# EAGLE board SchematicHandroute (EAGLE 9.5.2)
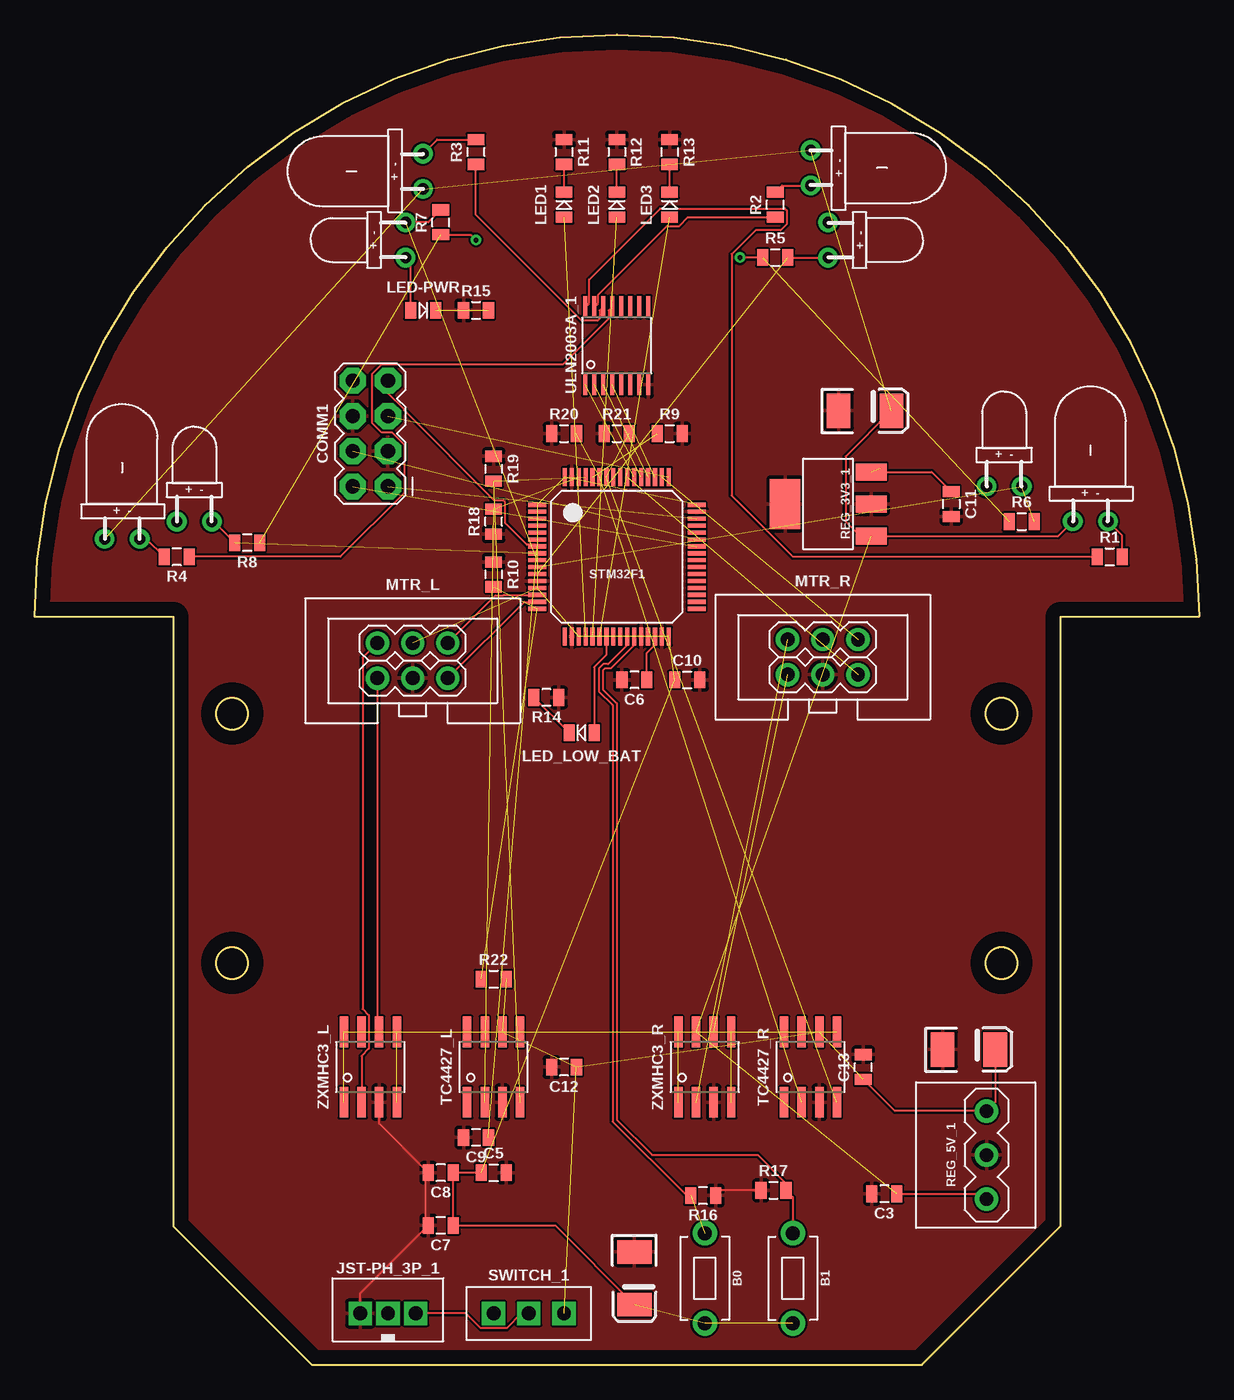
[diagram p0: board, top side]
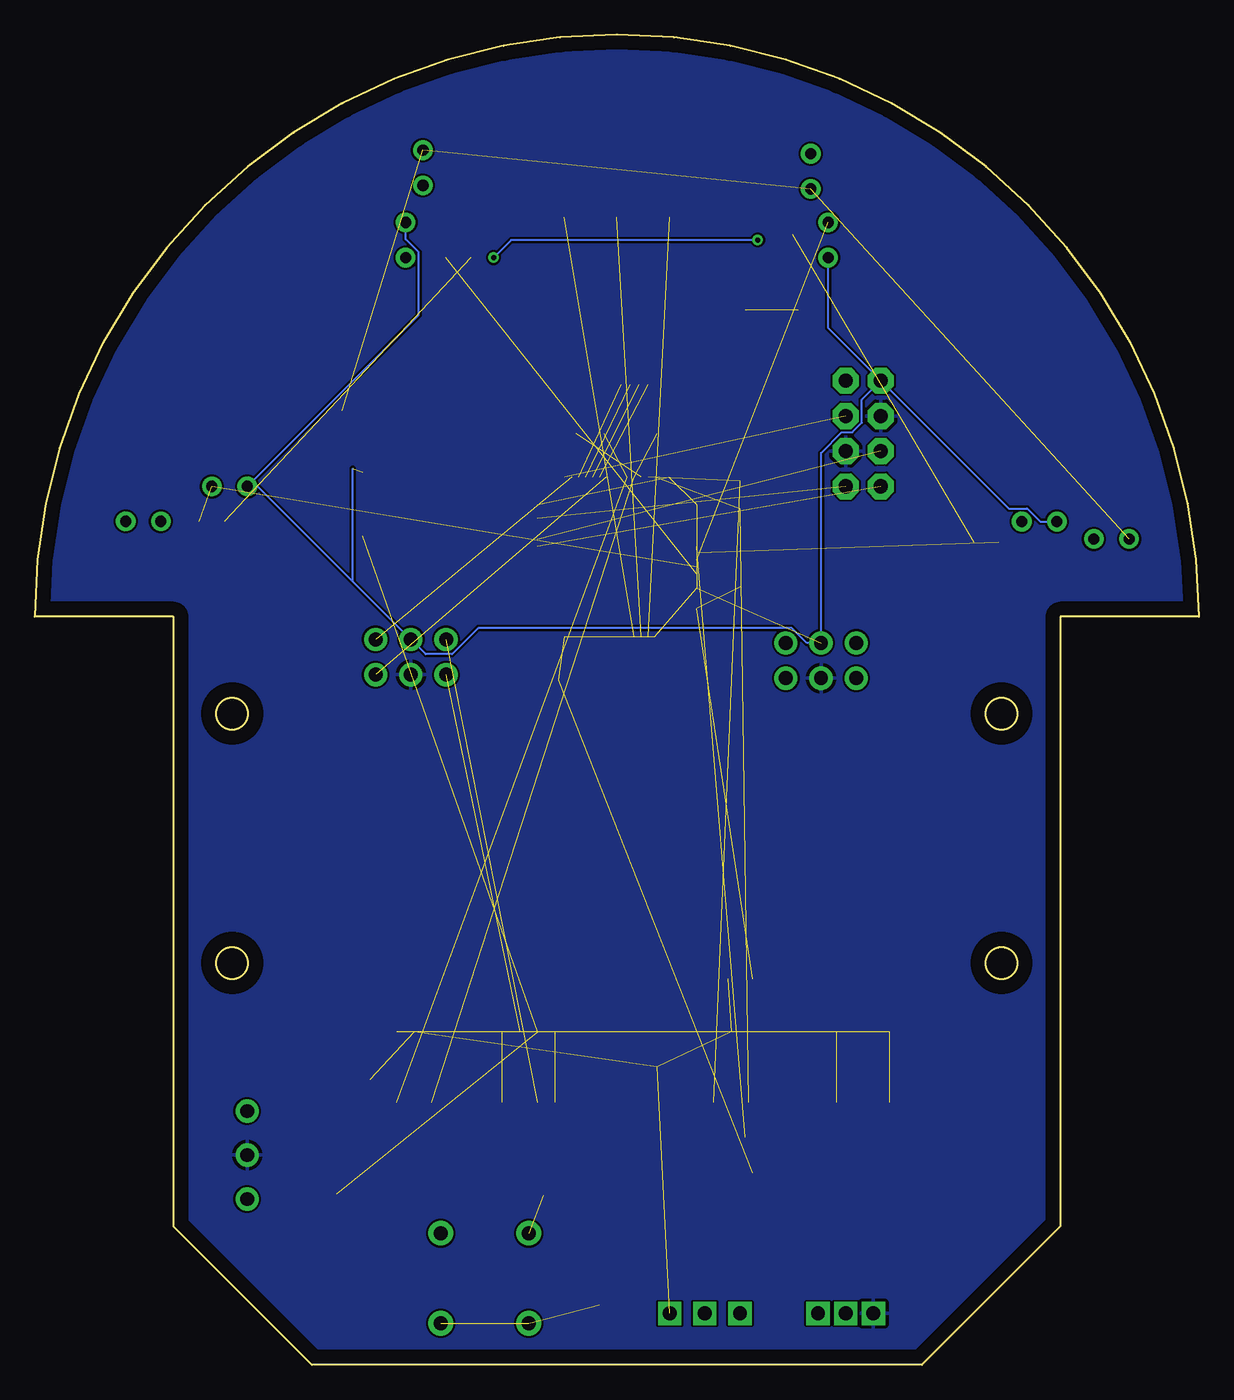
[diagram p1: board, bottom side, seen from below]

Size 84 x 96 mm. Coordinates in mm from the lower left corner, seen from the top.
Copper layers (1*16): Top 0.035mm / dielectric 1.5mm / Bottom 0.035mm
Design rules "default": minimum track width 6mil, minimum drill 0.35mm, track to track 6mil, track to pad 6mil, pad to pad 6mil, via to via 6mil, smd to smd 6mil, copper to edge 40mil, drill to drill 6mil, minimum pad ring 10mil, minimum via ring 8mil, stop-mask expansion 4mil, vias tented up to drill 0mil, thermal gap 10mil

## Footprints (pad centres in the part's own frame; a part is rotated, then mirrored left to right if it is on the bottom)
POLOLU_BUTTON = drill 1 pad 1.778: P$1 -3.25,0; P$2 3.25,0
CAP_TANT_1210IN_3528MM = smd 1.7 x 2.5: A 1.9,0; C -1.9,0
0805 = smd 0.8 x 1.2: 1 -0.9,0; 2 0.9,0
2X4 = drill 1.016 pad 1.88 octagon: 1 -3.81,-1.27; 2 -3.81,1.27; 3 -1.27,-1.27; 4 -1.27,1.27; 5 1.27,-1.27; 6 1.27,1.27; 7 3.81,-1.27; 8 3.81,1.27
EMITTER = drill 0.8 pad 1.422: EM_+ -1.397,0.016; EM_- 1.143,0.016
B3B-PH-K-S = drill 1 pad 1.676 square: BAT_+ 2,0; BAT_- -2,0; NC 0,0
LED-0805 = smd 0.8 x 1.2: A -0.9,0; C 0.9,0
MOTOR_ENCODER_HEADER = drill 1 pad 1.676: ENC_A 2.54,1.27; ENC_B 2.54,-1.27; ENC_GND 0,-1.27; ENC_VDD 0,1.27; MTR+ -2.54,1.27; MTR_- -2.54,-1.27
RECEIVER = drill 0.8 pad 1.422: RE_+ -1.27,0; RE_- 1.27,0
SOT223 = smd 1.219 x 2.235: GND 0,-3.099; IN -2.311,-3.099; OUT 2.311,-3.099 | smd 3.6 x 2.2: GND2 0,3.099
5V_REG_MURATA = drill 1 pad 1.676: GND 0,0; IN -3.175,0; OUT 3.175,0
LQFP64 = smd 0.3 x 1.3: BOOT0 -1.75,5.75; PA3 -3.75,-5.75; PA4 -2.25,-5.75; PA5 -1.75,-5.75; PA6 -1.25,-5.75; PA7 -0.75,-5.75; PA14 3.75,5.75; PA15 3.25,5.75; PB0 0.75,-5.75; PB1 1.25,-5.75; PB2 1.75,-5.75; PB3 0.75,5.75; PB4 0.25,5.75; PB5 -0.25,5.75; PB6 -0.75,5.75; PB7 -1.25,5.75; PB8 -2.25,5.75; PB9 -2.75,5.75; PB10 2.25,-5.75; PC4 -0.25,-5.75; PC5 0.25,-5.75; PC10 2.75,5.75; PC11 2.25,5.75; PC12 1.75,5.75; PD2 1.25,5.75; VCAP_1 2.75,-5.75; VDD_0 -2.75,-5.75; VDD_1 3.75,-5.75; VDD_3 -3.75,5.75; VSS_0 -3.25,-5.75; VSS_1 -3.25,5.75; VSS_2 3.25,-5.75 | smd 1.3 x 0.3: NRST -5.75,0.75; PA0_WKUP -5.75,-2.75; PA1 -5.75,-3.25; PA2 -5.75,-3.75; PA8 5.75,0.25; PA9 5.75,0.75; PA10 5.75,1.25; PA11 5.75,1.75; PA12 5.75,2.25; PA13 5.75,2.75; PB12 5.75,-3.75; PB13 5.75,-3.25; PB14 5.75,-2.75; PB15 5.75,-2.25; PC0 -5.75,0.25; PC1 -5.75,-0.25; PC2 -5.75,-0.75; PC3 -5.75,-1.25; PC6 5.75,-1.75; PC7 5.75,-1.25; PC8 5.75,-0.75; PC9 5.75,-0.25; PC13 -5.75,3.25; PC14 -5.75,2.75; PC15 -5.75,2.25; PH0 -5.75,1.75; PH1 -5.75,1.25; VBAT -5.75,3.75; VDD_2 5.75,3.75; VDDA -5.75,-2.25; VSS_3 5.75,3.25; VSSA -5.75,-1.75
POLOLU_SWITCH = drill 1 pad 1.676 square: PIN1 -2.54,0; PIN2 0,0; PIN3 2.54,0
TC4427_SOIC8 = smd 0.61 x 2.21: GND 0.635,-2.54; IN_A -0.635,-2.54; IN_B 1.905,-2.54; NC1 -1.905,-2.54; NC2 -1.905,2.54; OUT_A -0.635,2.54; OUT_B 1.905,2.54; VDD 0.635,2.54
ULN2003A = smd 1.55 x 0.3: 1B -2.8,2.275; 1C 2.8,2.275; 2B -2.8,1.625; 2C 2.8,1.625; 3B -2.8,0.975; 3C 2.8,0.975; 4B -2.8,0.325; 4C 2.8,0.325; 5B -2.8,-0.325; 5C 2.8,-0.325; 6B -2.8,-0.975; 6C 2.8,-0.975; 7B -2.8,-1.625; 7C 2.8,-1.625; COM 2.8,-2.275; GND -2.8,-2.275
ZXMHC3 = smd 0.61 x 2.21: N1D/P1D -0.635,-2.54; N1G -1.905,-2.54; N1S/N2S 0.635,-2.54; N2D/P2D 0.635,2.54; N2G 1.905,-2.54; P1G -1.905,2.54; P1S/P2S -0.635,2.54; P2G 1.905,2.54

## Placement (x,y rotation side)
B0  POLOLU_BUTTON  [POLOLU_BUTTON]  48.35,6.25 270 top
B1  POLOLU_BUTTON  [POLOLU_BUTTON]  54.7,6.25 270 top
C1  47uF  [CAP_TANT_1210IN_3528MM]  67.4,22.76 0 top
C2  47  [CAP_TANT_1210IN_3528MM]  59.91,68.86 0 top
C3  10uF  [0805]  61.3,12.35 180 top
C4  47uF  [CAP_TANT_1210IN_3528MM]  43.27,6.25 270 top
C5  0.1uF  [0805]  33.11,13.87 0 top
C6  2.2uF  [0805]  43.27,49.43 180 top
C7  0.1uF  [0805]  29.3,10.06 180 top
C8  0.1uF  [0805]  29.3,13.87 180 top
C9  0.1uF  [0805]  31.84,16.41 180 top
C10  0.1uF  [0805]  47.08,49.43 0 top
C11  0.1uF  [0805]  66.13,62.13 270 top
C12  1.0uF  [0805]  38.19,21.49 180 top
C13  1.0uF  [0805]  59.78,21.49 90 top
COMM1  M04X2  [2X4]  24.22,67.21 90 top
EM_1  SFH4545  [EMITTER]  76.29,60.86 0 top
EM_2  SFH4545  [EMITTER]  55.97,86.26 270 top
EM_3  SFH4545  [EMITTER]  28.03,86.26 90 top
EM_4  SFH4545  [EMITTER]  6.44,59.59 0 top
JST-PH_3P_1  3PIN  [B3B-PH-K-S]  25.49,3.71 0 top
LED1  LED  [LED-0805]  38.19,83.72 90 top
LED2  LED  [LED-0805]  42,83.72 90 top
LED3  LED  [LED-0805]  45.81,83.72 90 top
LED-PWR  LED  [LED-0805]  28.03,76.1 0 top
LED_LOW_BAT  LED  [LED-0805]  39.46,45.62 180 top
MTR_L  MOTOR_ENCODER_HEADER  [MOTOR_ENCODER_HEADER]  27.27,50.83 0 top
MTR_R  MOTOR_ENCODER_HEADER  [MOTOR_ENCODER_HEADER]  56.86,51.08 0 top
R1  16K  [0805]  77.56,58.32 0 top
R2  16K  [0805]  53.43,83.72 90 top
R3  16K  [0805]  31.84,87.53 90 top
R4  16K  [0805]  10.25,58.32 180 top
R5  1.8K  [0805]  53.43,79.91 0 top
R6  1.8K  [0805]  71.21,60.86 0 top
R7  1.8K  [0805]  29.3,82.45 90 top
R8  1.8K  [0805]  15.33,59.34 180 top
R9  47K  [0805]  45.81,67.21 0 top
R10  10K  [0805]  33.11,57.05 270 top
R11  1K  [0805]  38.19,87.53 270 top
R12  1K  [0805]  42,87.53 270 top
R13  1K  [0805]  45.81,87.53 270 top
R14  1K  [0805]  36.92,48.16 180 top
R15  1K  [0805]  31.84,76.1 0 top
R16  47K  [0805]  48.22,12.22 180 top
R17  47K  [0805]  53.3,12.6 0 top
R18  47K  [0805]  33.11,60.86 90 top
R19  47K  [0805]  33.11,64.67 270 top
R20  47K  [0805]  38.19,67.21 0 top
R21  47K  [0805]  42,67.21 0 top
R22  30K  [0805]  33.11,27.84 0 top
RE_LD  TEFT4300  [RECEIVER]  69.94,63.4 0 top
RE_LF  TEFT4300  [RECEIVER]  57.24,81.18 270 top
RE_RD  TEFT4300  [RECEIVER]  26.76,81.18 90 top
RE_RF  TEFT4300  [RECEIVER]  11.52,60.86 0 top
REG_3V3_1  3V3_REG  [SOT223]  57.24,62.13 90 top
REG_5V_1  REG_5V_MURATA  [5V_REG_MURATA]  68.67,15.14 270 top
STM32F1  STM32F4_401_410_411_412_413_446  [LQFP64]  42,58.32 0 top
SWITCH_1  POLOLU_SWITCH  [POLOLU_SWITCH]  35.65,3.71 0 top
TC4427_L  TC4427_SOIC8  [TC4427_SOIC8]  33.11,21.49 0 top
TC4427_R  TC4427_SOIC8  [TC4427_SOIC8]  55.97,21.49 0 top
U$1  [MOUSE_OUTLINE_2WHEEL]  42,38 0 top
ULN2003A_1  ULN2003A  [ULN2003A]  42,73.56 90 top
ZXMHC3_L  ZXMHC3  [ZXMHC3]  24.22,21.49 0 top
ZXMHC3_R  ZXMHC3  [ZXMHC3]  48.35,21.49 0 top

## Library data of the parts
B0 B1 = POLOLU_BUTTON
C1 C2 C4 = CAP_TANT_1210IN_3528MM
C3 C5-C13 = CAP_CERAMIC_0805IN_2012MM
COMM1 = 2X4_PIN_HEADER
EM_1-EM_4 = SFH4545
JST-PH_3P_1 = BATT_JST-PH_3PIN
LED1-LED3 LED-PWR LED_LOW_BAT = LED_0805
MTR_L MTR_R = MOTOR_ENCODER_HEADER
R1-R22 = RESISTOR_0805IN_2012MM
RE_LD RE_LF RE_RD RE_RF = TEFT4300
REG_3V3_1 = REG_3V3_LM3940
REG_5V_1 = REG_5V_MURATA
STM32F1 = STM32F4_401_410_411_412_413_446
SWITCH_1 = POLOLU_SWITCH
TC4427_L TC4427_R = TC4427
U$1 = MOUSE_OUTLINE_2WHEEL
ULN2003A_1 = ULN2003A
ZXMHC3_L ZXMHC3_R = ZXMHC3

## Nets
+3V3: B0.P$2 B1.P$2 C4.A C5.1 C7.1 C8.1 C10.1 C11.1 COMM1.8 LED-PWR.A MTR_L.ENC_VDD MTR_R.ENC_VDD RE_LD.RE_+ RE_LF.RE_+ RE_RD.RE_+ RE_RF.RE_+ REG_3V3_1.OUT STM32F1.VBAT STM32F1.VDD_0 STM32F1.VDD_1 STM32F1.VDD_2 STM32F1.VDD_3 STM32F1.VDDA
+5V: C2.A C3.1 EM_1.EM_+ EM_2.EM_+ EM_3.EM_+ EM_4.EM_+ REG_3V3_1.IN REG_5V_1.OUT ZXMHC3_L.P1S/P2S ZXMHC3_R.P1S/P2S
B0: B0.P$1 R16.2 STM32F1.PB0
B1: B1.P$1 R17.2 STM32F1.PB1
EM_LD: STM32F1.PC12 ULN2003A_1.2B
EM_LF: STM32F1.PD2 ULN2003A_1.1B
EM_RD: STM32F1.PC11 ULN2003A_1.3B
EM_RF: STM32F1.PC10 ULN2003A_1.4B
GND: C1.C C2.C C3.2 C4.C C5.2 C6.2 C7.2 C8.2 C9.2 C10.2 C11.2 C12.2 C13.2 COMM1.3 COMM1.6 JST-PH_3P_1.BAT_- MTR_L.ENC_GND MTR_R.ENC_GND R9.2 R10.1 R11.1 R12.1 R13.1 R14.1 R15.1 R16.1 R17.1 R18.1 R19.1 R20.1 R21.1 REG_3V3_1.GND REG_3V3_1.GND2 REG_5V_1.GND STM32F1.PB2 STM32F1.VSS_0 STM32F1.VSS_1 STM32F1.VSS_2 STM32F1.VSS_3 STM32F1.VSSA TC4427_L.GND TC4427_R.GND ULN2003A_1.GND ZXMHC3_L.N1S/N2S ZXMHC3_R.N1S/N2S
LED1: LED1.A STM32F1.PA4
LED2: LED2.A STM32F1.PA5
LED3: LED3.A STM32F1.PA6
LED_LOW_BAT: LED_LOW_BAT.A STM32F1.PA7
LENC_A: MTR_L.ENC_A STM32F1.PA0_WKUP
LENC_B: MTR_L.ENC_B STM32F1.PA1
LMTR+: MTR_L.MTR+ ZXMHC3_L.N1D/P1D
LMTR-: MTR_L.MTR_- ZXMHC3_L.N2D/P2D
LPWM_A: R18.2 STM32F1.PB9 TC4427_L.IN_A
LPWM_B: R19.2 STM32F1.PB8 TC4427_L.IN_B
N$1: R1.1 ULN2003A_1.1C
N$2: R2.1 ULN2003A_1.2C
N$3: R3.1 ULN2003A_1.3C
N$4: R4.1 ULN2003A_1.4C
N$5: EM_1.EM_- R1.2
N$6: EM_2.EM_- R2.2
N$7: EM_3.EM_- R3.2
N$8: EM_4.EM_- R4.2
N$9: JST-PH_3P_1.BAT_+ SWITCH_1.PIN2
N$14: R5.1 R6.1 R7.1 R8.1
N$15: R9.1 STM32F1.BOOT0
N$16: C6.1 STM32F1.VCAP_1
N$17: TC4427_L.OUT_B ZXMHC3_L.N2G ZXMHC3_L.P2G
N$18: TC4427_L.OUT_A ZXMHC3_L.N1G ZXMHC3_L.P1G
N$19: TC4427_R.OUT_A ZXMHC3_R.N1G ZXMHC3_R.P1G
N$20: TC4427_R.OUT_B ZXMHC3_R.N2G ZXMHC3_R.P2G
N$21: LED1.C R11.2
N$22: LED2.C R12.2
N$23: LED3.C R13.2
N$24: LED_LOW_BAT.C R14.2
N$25: LED-PWR.C R15.2
NRST: C9.1 COMM1.7 STM32F1.NRST
RE_LD: R6.2 RE_LD.RE_- STM32F1.PC2
RE_LF: R5.2 RE_LF.RE_- STM32F1.PC3
RE_RD: R7.2 RE_RD.RE_- STM32F1.PC1
RE_RF: R8.2 RE_RF.RE_- STM32F1.PC0
RENC_A: MTR_R.ENC_A STM32F1.PA15
RENC_B: MTR_R.ENC_B STM32F1.PB3
RMTR+: MTR_R.MTR+ ZXMHC3_R.N1D/P1D
RMTR-: MTR_R.MTR_- ZXMHC3_R.N2D/P2D
RPWM_A: R20.2 STM32F1.PB7 TC4427_R.IN_A
RPWM_B: R21.2 STM32F1.PB6 TC4427_R.IN_B
RX: COMM1.4 STM32F1.PA10
SWCLK: COMM1.5 STM32F1.PA14
SWDIO: COMM1.1 STM32F1.PA13
TX: COMM1.2 STM32F1.PA9
V+: C1.A C12.1 C13.1 R22.2 REG_5V_1.IN SWITCH_1.PIN3 TC4427_L.VDD TC4427_R.VDD
VOLTMETER: R10.2 R22.1 STM32F1.PA2

## Tracks (layer width: path | path; a pad name or v marks a point on that pad's centre or on a via)
+3V3  (11 unrouted)
  Top 0.152: LED-PWR.A 27.13,79.54 RE_RD.RE_+ | C5.1 C8.1 C7.1 37.56,10.06 C4.A | REG_3V3_1.OUT 64.72,64.44 C11.1
  Bottom 0.152: MTR_R.ENC_VDD 55.79,51.28 53.88,51.28 52,53.16 29.37,53.16 28.3,52.1 MTR_L.ENC_VDD 27.27,65.81 25.77,67.31 25.01,67.31 24.32,68 24.32,69.65 COMM1.8 | COMM1.8 13.73,61.8 12.4,61.8 11.46,60.86 RE_RF.RE_+ | COMM1.8 26.76,74.83 RE_RD.RE_+ | MTR_R.ENC_VDD 67.91,63.4 RE_LD.RE_+ 56.3,75.77 56.3,80.3 57.24,81.24 RE_LF.RE_+ | MTR_R.ENC_VDD 61.05,56.54 61.05,64.67
+5V  (6 unrouted)
  Top 0.152: C3.1 68.29,12.35 REG_5V_1.OUT | EM_1.EM_+ 73.84,59.82 REG_3V3_1.IN 59.55,59.82 58.51,60.86 58.51,65.56 C2.A
B0  (1 unrouted)
  Top 0.152: STM32F1.PB0 42.75,51.95 41.37,50.56 41.01,50.56 40.7,50.25 40.7,48.61 41.7,47.61 41.7,17.55 47.03,12.22 R16.2
B1
  Top 0.152: STM32F1.PB1 43.25,51.95 41.56,50.26 41.13,50.26 41,50.12 41,48.73 42,47.74 42,17.68 44.54,15.14 52.16,15.14 54.2,13.1 R17.2 54.7,12.1 B1.P$1
EM_LD  (1 unrouted)
EM_LF  (1 unrouted)
EM_RD  (1 unrouted)
EM_RF  (1 unrouted)
GND
  Top 0.152: R17.1 49.5,12.6 R16.1 | C8.2 28.21,14.06 | 28.21,14.06 24.85,17.42 ZXMHC3_L.N1S/N2S | 28.21,14.06 28.21,10.25 C7.2 23.49,5.15 JST-PH_3P_1.BAT_-
  pour Top (isolate 0): -6.26,101.5 78.83,101.5 92.8,87.53 92.8,-3.91 88.99,-7.72 -7.53,-7.72 -8.8,-6.45 -8.8,98.96
  pour Bottom (isolate 0): -13.88,109.12 91.53,109.12 97.88,102.77 97.88,-21.69 96.61,-22.96 -3.72,-22.96 -15.15,-11.53 -15.15,107.85
LED1  (1 unrouted)
LED2  (1 unrouted)
LED3  (1 unrouted)
LED_LOW_BAT
  Top 0.152: STM32F1.PA7 41.25,51.23 40.36,50.34 LED_LOW_BAT.A
LENC_A
  Top 0.152: MTR_L.ENC_A 33.23,55.52 33.8,55.52 33.85,55.57 STM32F1.PA0_WKUP
LENC_B
  Top 0.152: MTR_L.ENC_B 35.32,55.07 STM32F1.PA1
LMTR+
  Top 0.152: ZXMHC3_L.N1D/P1D 23.58,22.3 24.12,22.83 24.12,25.23 23.66,25.69 23.66,51.03 MTR_L.MTR+
LMTR-
  Top 0.152: MTR_L.MTR_- 24.73,24.16 ZXMHC3_L.N2D/P2D
LPWM_A  (2 unrouted)
LPWM_B  (2 unrouted)
N$1
  Top 0.152: R1.1 54.7,58.32 50.28,62.74 50.28,80.16 52.01,81.89 53.82,81.89 54.26,82.33 54.26,83.31 54.12,83.45 45.11,83.45 40,78.33 40,76.63 ULN2003A_1.1C
N$2
  Top 0.152: ULN2003A_1.2C 40.65,76.63 40.65,77.23 45.61,82.19 46.5,82.19 47.13,82.82 R2.1
N$3
  Top 0.152: ULN2003A_1.3C 40.75,76.09 40.75,75.49 40.62,75.36 39.48,75.36 31.84,83 R3.1
N$4
  Top 0.152: ULN2003A_1.4C 41.4,76.09 41.4,75.49 38.1,72.19 25.01,72.19 24.32,71.5 24.32,68 25.01,67.31 25.77,67.31 26.66,66.42 26.66,62.92 22.06,58.32 R4.1
N$5
  Top 0.152: R1.2 78.46,59.85 EM_1.EM_-
N$6
  Top 0.152: R2.2 53.93,85.12 EM_2.EM_-
N$7
  Top 0.152: EM_3.EM_- 29.04,88.43 R3.2
N$8
  Top 0.152: R4.2 8.06,59.61 EM_4.EM_-
N$9
  Top 0.152: SWITCH_1.PIN2 35.11,3.71 34.04,2.64 32.18,2.64 31.11,3.71 JST-PH_3P_1.BAT_+
N$14  (via drill 0.35)  (2 unrouted)
  Top 0.152: R7.1 31.47,81.55 v31.84,81.18 | R5.1 v50.89,79.91
  Bottom 0.152: v31.84,81.18 49.62,81.18 v50.89,79.91
N$15  (1 unrouted)
N$16
  Top 0.152: C6.1 44.17,51.37 44.75,51.95 STM32F1.VCAP_1
N$17  (2 unrouted)
N$18  (2 unrouted)
N$19  (2 unrouted)
N$20  (2 unrouted)
N$21
  Top 0.152: LED1.C R11.2
N$22
  Top 0.152: LED2.C R12.2
N$23
  Top 0.152: LED3.C R13.2
N$24
  Top 0.152: LED_LOW_BAT.C R14.2
N$25  (1 unrouted)
NRST  (1 unrouted)
  Top 0.152: STM32F1.NRST 36.13,59.19 35.5,59.19 33.94,60.76 33.94,62.26 33.8,62.39 33.17,62.39 26.66,68.9 26.66,68.96 25.49,70.13 COMM1.7
RE_LD  (2 unrouted)
RE_LF  (1 unrouted)
  Top 0.152: R5.2 RE_LF.RE_-
RE_RD  (1 unrouted)
  Top 0.152: R7.2 28.4,82.45 RE_RD.RE_-
RE_RF  (1 unrouted)
  Top 0.152: R8.2 12.91,60.86 RE_RF.RE_-
RENC_A  (1 unrouted)
RENC_B  (1 unrouted)
RMTR+  (1 unrouted)
RMTR-  (1 unrouted)
RPWM_A  (2 unrouted)
RPWM_B  (2 unrouted)
RX  (1 unrouted)
SWCLK  (1 unrouted)
SWDIO  (1 unrouted)
TX  (1 unrouted)
V+  (5 unrouted)
  Top 0.152: C1.A 69.3,18.95 REG_5V_1.IN 62.05,18.32 C13.1
VOLTMETER  (2 unrouted)